# EAGLE board untitled (EAGLE 6.2)

Size 100 x 80 mm. Coordinates in mm from the lower left corner, seen from the top.
Outline: 0,0 100,0 100,80 0,80 0,0
Copper layers (1*16): Top 0.035mm / dielectric 1.5mm / Bottom 0.035mm
Design rules: minimum track width 10mil, minimum drill 24mil, track to track 8mil, track to pad 8mil, pad to pad 8mil, via to via 8mil, smd to smd 8mil, copper to edge 40mil, drill to drill 8mil, minimum pad ring 10mil, minimum via ring 8mil, stop-mask expansion 4mil, vias tented up to drill 0mil, thermal gap 10mil

## Footprints (pad centres in the part's own frame; a part is rotated, then mirrored left to right if it is on the bottom)
CHP-5 = smd 0.5 x 0.8: 1 -0.95,-1.4; 2 0.95,-1.4; 3 -0.95,1.4; 4 0,1.4; 5 0.95,1.4
DIL08 = drill 0.813 long: 1 -2.54,-3.81; 2 0,-3.81; 3 2.54,-3.81; 4 5.08,-3.81; 5 5.08,3.81; 6 2.54,3.81; 7 0,3.81; 8 -2.54,3.81
QFP50P1400X1400X120-80N = smd 1.473 x 0.279: 1 -6.756,4.75; 2 -6.756,4.242; 3 -6.756,3.759; 4 -6.756,3.251; 5 -6.756,2.743; 6 -6.756,2.261; 7 -6.756,1.753; 8 -6.756,1.245; 9 -6.756,0.762; 10 -6.756,0.254; 11 -6.756,-0.254; 12 -6.756,-0.762; 13 -6.756,-1.245; 14 -6.756,-1.753; 15 -6.756,-2.261; 16 -6.756,-2.743; 17 -6.756,-3.251; 18 -6.756,-3.759; 19 -6.756,-4.242; 20 -6.756,-4.75; 41 6.756,-4.75; 42 6.756,-4.242; 43 6.756,-3.759; 44 6.756,-3.251; 45 6.756,-2.743; 46 6.756,-2.261; 47 6.756,-1.753; 48 6.756,-1.245; 49 6.756,-0.762; 50 6.756,-0.254; 51 6.756,0.254; 52 6.756,0.762; 53 6.756,1.245; 54 6.756,1.753; 55 6.756,2.261; 56 6.756,2.743; 57 6.756,3.251; 58 6.756,3.759; 59 6.756,4.242; 60 6.756,4.75 | smd 0.279 x 1.473: 21 -4.75,-6.756; 22 -4.242,-6.756; 23 -3.759,-6.756; 24 -3.251,-6.756; 25 -2.743,-6.756; 26 -2.261,-6.756; 27 -1.753,-6.756; 28 -1.245,-6.756; 29 -0.762,-6.756; 30 -0.254,-6.756; 31 0.254,-6.756; 32 0.762,-6.756; 33 1.245,-6.756; 34 1.753,-6.756; 35 2.261,-6.756; 36 2.743,-6.756; 37 3.251,-6.756; 38 3.759,-6.756; 39 4.242,-6.756; 40 4.75,-6.756; 61 4.75,6.756; 62 4.242,6.756; 63 3.759,6.756; 64 3.251,6.756; 65 2.743,6.756; 66 2.261,6.756; 67 1.753,6.756; 68 1.245,6.756; 69 0.762,6.756; 70 0.254,6.756; 71 -0.254,6.756; 72 -0.762,6.756; 73 -1.245,6.756; 74 -1.753,6.756; 75 -2.261,6.756; 76 -2.743,6.756; 77 -3.251,6.756; 78 -3.759,6.756; 79 -4.242,6.756; 80 -4.75,6.756
TO-263 = smd 1 x 3.4: 1 -2.54,-6.6; 2 2.54,-6.6 | smd 6.8 x 9.6: 3 0,3.5
1608 = smd 1 x 1.1: 1 -0.91,0.05; 2 0.79,0.05
PIN_HEADER_5 = drill 0.8: 1 -5.08,0; 2 -2.54,0; 3 0,0; 4 2.54,0; 5 5.08,0
PIN_HEADER_6 = drill 0.8: 1 -5.08,0; 2 -2.54,0; 3 0,0; 4 2.54,0; 5 5.08,0; 6 7.62,0

## Placement (x,y rotation side)
F1  CPH5617  [CHP-5]  34.16,68.91 0 top
F2  CPH5617  [CHP-5]  23.62,69.8 0 top
F3  CPH5617  [CHP-5]  13.16,71.96 0 top
F4  CPH5617  [CHP-5]  6.62,74.12 0 top
IC_L_I_D  TLP351  [DIL08]  -58.42,46.99 0 top  (outside the outline)
IC_L_I_U  TLP351  [DIL08]  -71.12,46.99 0 top  (outside the outline)
IC_L_O_D  TLP351  [DIL08]  -20.32,46.99 0 top  (outside the outline)
IC_L_O_U  TLP351  [DIL08]  -33.02,46.99 0 top  (outside the outline)
IC_MAIN  DSPIC33FJ64MC508IP  [QFP50P1400X1400X120-80N]  -39.37,11.43 0 top  (outside the outline)
IC_R_I_D  TLP351  [DIL08]  -33.02,59.69 0 top  (outside the outline)
IC_R_I_U  TLP351  [DIL08]  -45.72,46.99 0 top  (outside the outline)
IC_R_O_D  TLP351  [DIL08]  -45.72,59.69 0 top  (outside the outline)
IC_R_O_U  TLP351  [DIL08]  -20.32,59.69 0 top  (outside the outline)
NLL  FDB8441  [TO-263]  6.39,30.16 0 top
NLR  FDB8441  [TO-263]  18.69,30.16 0 top
NRL  FDB8441  [TO-263]  -80.01,10.16 0 top  (outside the outline)
NRR  FDB8441  [TO-263]  -19.05,31.75 0 top  (outside the outline)
PLL  SUM110P06  [TO-263]  6.75,48.25 180 top
PLR  SUM110P06  [TO-263]  18.45,48.25 180 top
PRL  SUM110P06  [TO-263]  -57.15,31.75 0 top  (outside the outline)
PRR  SUM110P06  [TO-263]  -69.85,31.75 0 top  (outside the outline)
R1  RESISTOR__SMD  [1608]  -67.31,55.88 0 top  (outside the outline)
R2  RESISTOR__SMD  [1608]  -27.94,68.58 0 top  (outside the outline)
R3  RESISTOR__SMD  [1608]  -45.72,68.58 0 top  (outside the outline)
R4  RESISTOR__SMD  [1608]  -63.5,68.58 0 top  (outside the outline)
R5  RESISTOR__SMD  [1608]  -81.28,68.58 0 top  (outside the outline)
R6  RESISTOR__SMD  [1608]  -27.94,73.66 0 top  (outside the outline)
R7  RESISTOR__SMD  [1608]  -45.72,73.66 0 top  (outside the outline)
R8  RESISTOR__SMD  [1608]  -63.5,73.66 0 top  (outside the outline)
R9  RESISTOR__SMD  [1608]  -81.28,73.66 0 top  (outside the outline)
R10  RESISTOR__SMD  [1608]  -27.94,78.74 0 top  (outside the outline)
R11  RESISTOR__SMD  [1608]  -45.72,78.74 0 top  (outside the outline)
R12  RESISTOR__SMD  [1608]  -63.5,78.74 0 top  (outside the outline)
R13  RESISTOR__SMD  [1608]  -81.28,78.74 0 top  (outside the outline)
R14  RESISTOR__SMD  [1608]  -27.94,83.82 0 top  (outside the outline)
R15  RESISTOR__SMD  [1608]  -45.72,83.82 0 top  (outside the outline)
R16  RESISTOR__SMD  [1608]  -63.5,83.82 0 top  (outside the outline)
U$1  PIN_HEADER_5  [PIN_HEADER_5]  13.26,7.46 0 top
U$4  PIN_HEADER_6  [PIN_HEADER_6]  -78.74,-6.35 0 top  (outside the outline)
U$5  PIN_HEADER_6  [PIN_HEADER_6]  -78.74,-10.16 0 top  (outside the outline)
U$20  PIN_HEADER_6  [PIN_HEADER_6]  -78.74,-13.97 0 top  (outside the outline)

## Library data of the parts
F1-F4 NLL NLR NRL NRR PLL PLR PRL PRR = 06_FET
IC_L_I_D IC_L_I_U IC_L_O_D IC_L_O_U IC_R_I_D IC_R_I_U IC_R_O_D IC_R_O_U = 04_IC
IC_MAIN = 07_PIC
R1-R16 = 01_R
U$1 U$4 U$5 U$20 = 08_CONECTOR

## Nets
+3.3V: IC_MAIN.12 IC_MAIN.25 IC_MAIN.32 IC_MAIN.48 IC_MAIN.71 U$1.2
+5V: IC_L_I_D.2 IC_L_I_U.2 IC_L_O_D.2 IC_L_O_U.2 IC_R_I_D.2 IC_R_I_U.2 IC_R_O_D.2 IC_R_O_U.2 U$4.1 U$4.4 U$5.1 U$5.4 U$20.1 U$20.4
+16.8V: IC_L_I_D.8 IC_L_I_U.8 IC_L_O_D.8 IC_L_O_U.8 IC_R_I_D.8 IC_R_I_U.8 IC_R_O_D.8 IC_R_O_U.8 PLL.2 PLR.2 PRL.2 PRR.2
GND: F1.4 F2.4 F3.4 F4.4 IC_L_I_D.5 IC_L_I_U.5 IC_L_O_D.5 IC_L_O_U.5 IC_MAIN.11 IC_MAIN.26 IC_MAIN.31 IC_MAIN.51 IC_R_I_D.5 IC_R_I_U.5 IC_R_O_D.5 IC_R_O_U.5 NLL.2 NLR.2 NRL.2 NRR.2 U$1.3 U$4.3 U$4.6 U$5.3 U$5.6 U$20.3 U$20.6
N$1: F2.2 R4.1
N$2: F2.1 R3.2
N$3: IC_L_O_D.3 R3.1
N$4: IC_L_I_D.3 R4.2
N$5: IC_MAIN.19 U$4.2
N$7: F1.2 R1.1
N$8: F1.1 R2.2
N$9: NLL.1 R7.1
N$10: NLR.1 R8.2
N$11: IC_L_O_D.6 R7.2
N$12: NLL.3 PLL.3
N$13: NLR.3 PLR.3
N$14: IC_L_I_D.6 R8.1
N$15: PLL.1 R5.1
N$16: IC_L_O_U.6 R5.2
N$17: IC_L_O_U.3 R1.2
N$18: IC_L_I_U.3 R2.1
N$19: IC_MAIN.20 U$4.5
N$20: IC_MAIN.18 U$5.2
N$21: PLR.1 R6.2
N$22: IC_L_I_U.6 R6.1
N$23: NRL.3 PRL.3
N$24: NRR.3 PRR.3
N$25: IC_R_I_D.3 R9.1
N$26: IC_R_O_D.3 R10.2
N$27: IC_MAIN.17 U$5.5
N$28: IC_MAIN.16 U$20.2
N$29: IC_R_I_U.3 R11.2
N$30: IC_R_O_U.3 R12.1
N$31: IC_MAIN.15 U$20.5
N$33: F4.2 R10.1
N$34: F4.1 R9.2
N$35: F3.2 R11.1
N$36: F3.1 R12.2
N$37: NRL.1 R13.1
N$38: IC_R_I_D.6 R13.2
N$39: NRR.1 R14.2
N$40: IC_R_O_D.6 R14.1
N$41: PRL.1 R15.1
N$42: IC_R_I_U.6 R15.2
N$43: PRR.1 R16.2
N$44: IC_R_O_U.6 R16.1
PGC1: IC_MAIN.21 U$1.5
PGD1: IC_MAIN.22 U$1.4
VCAP/VDDCORE: IC_MAIN.70
VPP: IC_MAIN.9 U$1.1

## Tracks (layer width: path | path; a pad name or v marks a point on that pad's centre or on a via)
+3.3V  (5 unrouted)
+5V  (13 unrouted)
+16.8V  (11 unrouted)
GND  (26 unrouted)
N$1  (1 unrouted)
N$2  (1 unrouted)
N$3  (1 unrouted)
N$4  (1 unrouted)
N$5  (1 unrouted)
N$7  (1 unrouted)
N$8  (1 unrouted)
N$9  (1 unrouted)
N$10  (1 unrouted)
N$11  (1 unrouted)
N$12  (1 unrouted)
N$13  (1 unrouted)
N$14  (1 unrouted)
N$15  (1 unrouted)
N$16  (1 unrouted)
N$17  (1 unrouted)
N$18  (1 unrouted)
N$19  (1 unrouted)
N$20  (1 unrouted)
N$21  (1 unrouted)
N$22  (1 unrouted)
N$23  (1 unrouted)
N$24  (1 unrouted)
N$25  (1 unrouted)
N$26  (1 unrouted)
N$27  (1 unrouted)
N$28  (1 unrouted)
N$29  (1 unrouted)
N$30  (1 unrouted)
N$31  (1 unrouted)
N$33  (1 unrouted)
N$34  (1 unrouted)
N$35  (1 unrouted)
N$36  (1 unrouted)
N$37  (1 unrouted)
N$38  (1 unrouted)
N$39  (1 unrouted)
N$40  (1 unrouted)
N$41  (1 unrouted)
N$42  (1 unrouted)
N$43  (1 unrouted)
N$44  (1 unrouted)
PGC1  (1 unrouted)
PGD1  (1 unrouted)
VPP  (1 unrouted)